# Altium PCB LED.PcbDoc
Units mm, origin at the board's own origin, x right, y up, seen from the top; angles counter-clockwise.
Board outline 20 x 20 mm, 2 copper layers (Top Layer, Bottom Layer), stack 1.671 mm thick; 5 components, 4 nets, 10 pads, 1 vias.
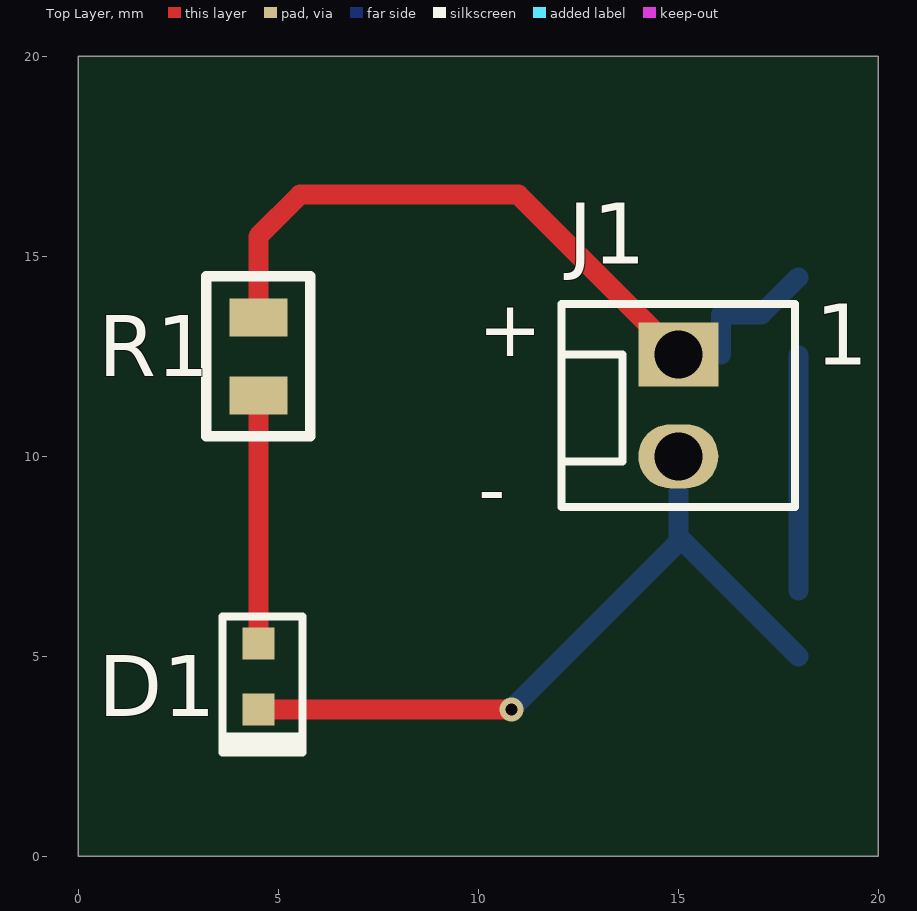
[diagram p0: Top Layer view]
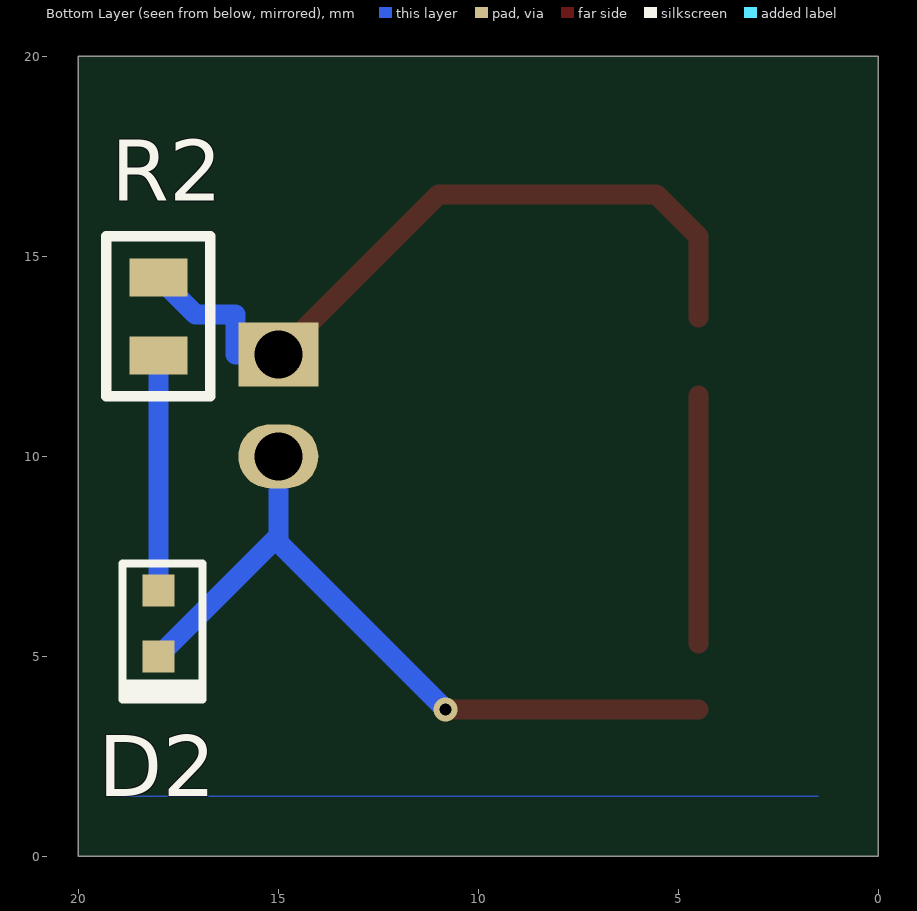
[diagram p1: Bottom Layer view, seen from below]
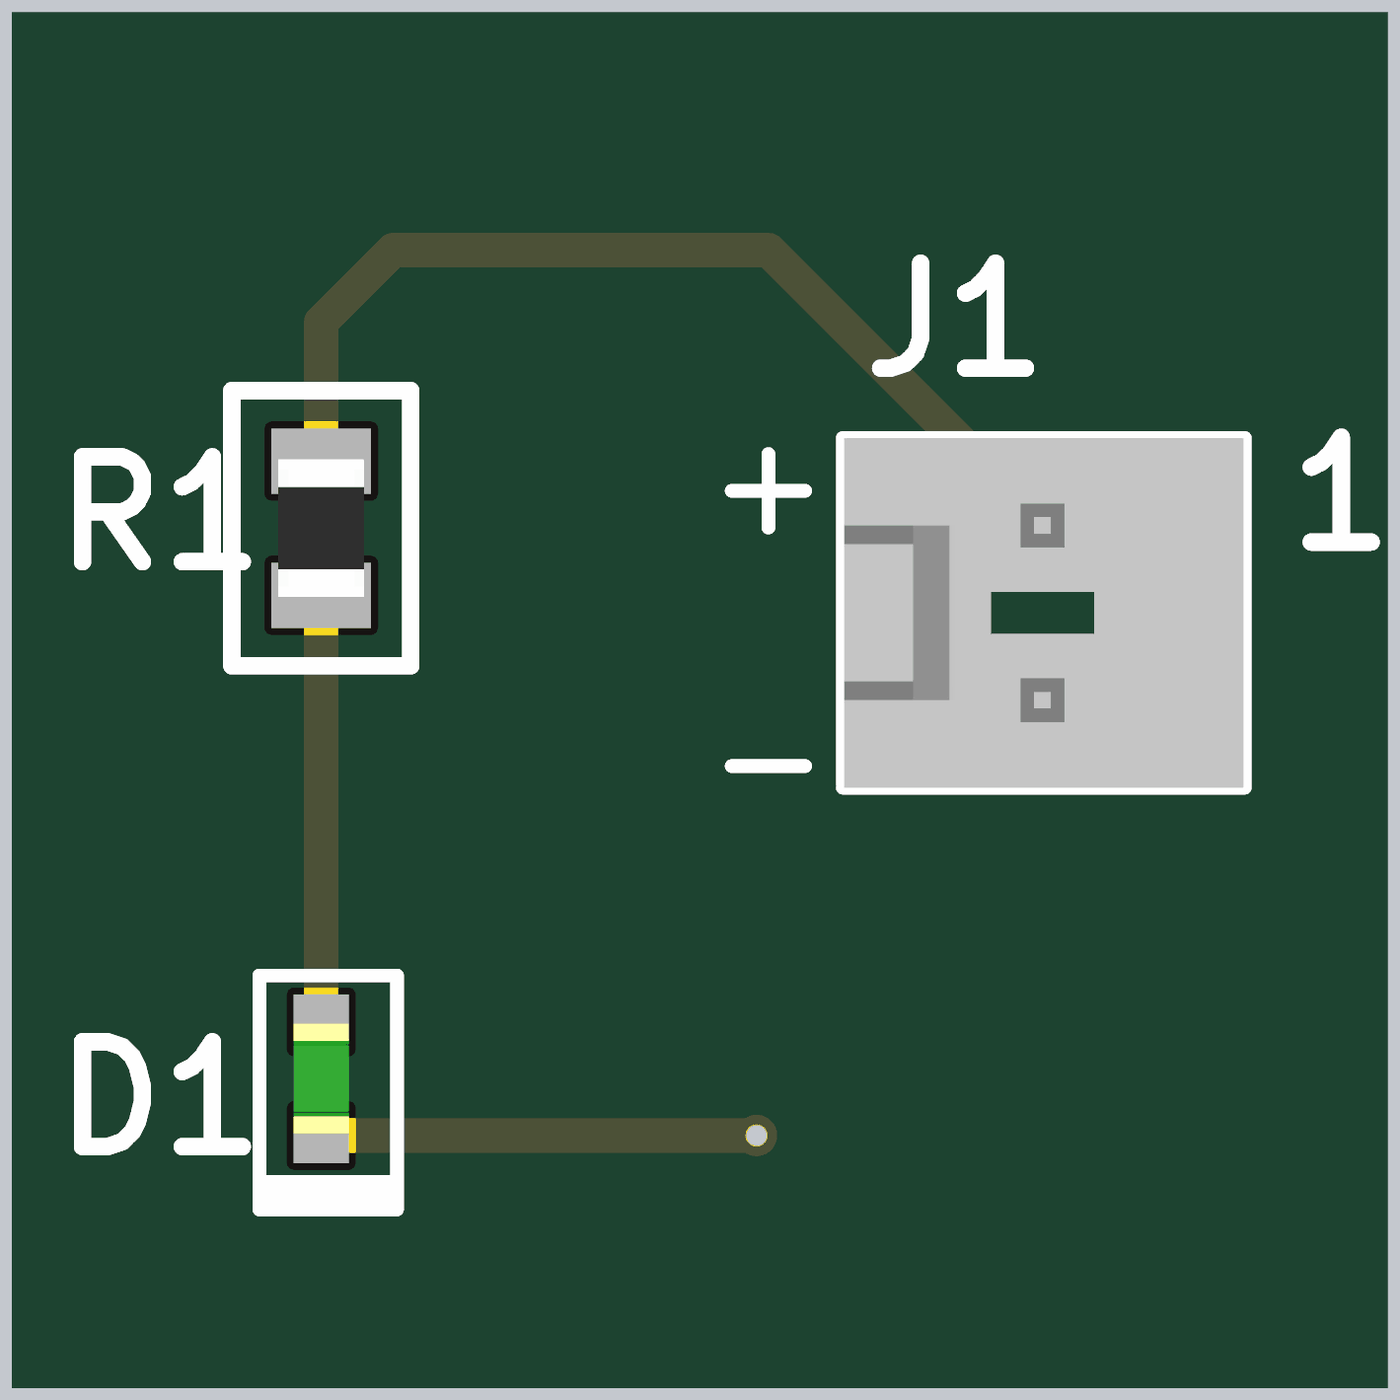
[diagram p2: 3D render of the assembled board from above, using the file's embedded part models]

## Layer stack, top to bottom
Top Solder: solder mask 0.0102, Solder Resist, Dk 3.5
Top Layer: signal copper 0.0356
Dielectric 1: dielectric 1.6, FR-4, Dk 4.8
Bottom Layer: signal copper 0.0356
Bottom Solder: solder mask 0.0102, Solder Resist, Dk 3.5

## Board outline
0,0 20,0 20,20 0,20

## Design rules (kind name [scope] priority, off if disabled: settings)
Clearance [All] p1: gap=0.3 ignorepadtopadclearanceinfootprint=FALSE
PolygonConnect [All] p1: connectstyle=Relief reliefconductorwidth=0.254 reliefentries=4 polygonreliefangle="90 Angle" airgapwidth=0.254
RoutingVias [All] p1: holewidth=0.3 width=0.6 viastyle="Through Hole" minholewidth=0.3 minwidth=0.6 maxholewidth=0.3 maxwidth=0.6
SilkToSolderMaskClearance [IsPad] p1: minsilkscreentomaskgap=0.1 clearancetoexposedcopper=TRUE
SolderMaskExpansion [All] p1: expansion=0.102
Width [All] p1: maxlimit=1 minlimit=0.3 preferedwidth=0.5
29 further rules are at their usual default settings.

## Components (designator, comment, footprint, x,y, rotation, side; value= is the part's Value field where it differs from the comment)
D1 "Green" LED0603G 4.5,4.5 r90 top
D2 "Green" LED0603G 18,5.825 r90 bottom
J1 "1x2 Header" HEADER1X2 15,12.54 r0 top
R1 "360R" R0805 4.5,12.5 r90 top
R2 "360R" R0805 18,13.5 r90 bottom

## Footprints (in the part's own frame and the unit in brackets; to place one, negate y for a bottom-side part, rotate by r counter-clockwise, add the part's x,y. Pads: shape width x height; smd on the part's side, far side on the other; paste and mask are expansions set on the pad)
HEADER1X2 [mm]
  rect 2x1.6 hole 1.2: 1(0,0)
  oval 2x1.6 hole 1.2: 2(0,-2.54)
  silkscreen extent -2.92,-3.81 2.92,1.27, body extent -2.9,-3.81 2.9,1.27, height 11.71
LED0603G [mm]
  rect 0.8x0.8 smd: 1(-0.825,0) 2(0.825,0)
  silkscreen extent -1.9,-1.1 1.5,0.9, body extent -0.8,-0.4 0.8,0.4, height 0.4
R0805 [mm]
  rect 0.95x1.45 smd: 1(-0.975,0) 2(0.975,0)
  silkscreen extent -2,-1.3 2,1.3, body extent -1,-0.62 1,0.63, height 0.61

## Part data
D1 D2: library part SML-LXFM0603SUGCTR, "Super Ultra Green 1.6 x 0.8 mm 120° Water Clear 50 mcd 2.2 V Surface Mount LED", Case/Package=0603, Forward Current=20mA, Forward Voltage=2.2V, Manufacturer=Lumex, Max Operating Temperature=85°C, Min Operating Temperature=-40°C, Package Quantity=2000, Power Rating=105mW, Supplier Part Number 1=67-2320-6-ND, Category=Optoelectronics, Color=Green, ComponentLink1Description=http://www.mouser.com/ds/2/244/SML-LXFM0603SUGCTR-115255.pdf?src-supplier=Mouser, ComponentLink1URL=http://www.mouser.com/ds/2/244/SML-LXFM0603SUGCTR-115255.pdf?src-supplier=Mouser, ComponentLink2Description=http://www.lumex.com/specs/SML-LXFM0603SUGCTR.pdf?src-supplier=Future+Electronics, ComponentLink2URL=http://www.lumex.com/specs/SML-LXFM0603SUGCTR.pdf?src-supplier=Future+Electronics, Illumination Color=Green, Lead Free="Lead Free", Lens Style=Clear, Luminous Intensity=50mcd, Manufacturer Part Number=SML-LXFM0603SUGCTR, Mount="Surface Mount", Packaging="Tape and Reel", Pricing 1="1=1.04, 10=0.676, 100=0.4431, 1000=0.3498 (USD)", RoHS Compliant=Yes, Stock 1=27636, Supplier 1=Digi-Key, Viewing Angle=120°
J1: library part 22-27-2021, "CONN HEADER 2POS .100 VERT TIN", Color=White, Contact Resistance=20mR, Current Rating=4A, Flammability Rating="UL94 V-0", Housing Color=Natural, Insulation Resistance=50GR, Manufacturer=Molex, Max Operating Temperature=75°C, Min Operating Temperature=0°C, Package Quantity=24000, Supplier Part Number 1=WM4111-ND, Voltage Rating=500V, Voltage Rating (AC)=250V, Approvals=UL,CSA, Categories=Connectors, ComponentLink1Description=https://www.verical.com/server-webapp/html/getDatasheet?partID=163454&src-supplier=Verical, ComponentLink1URL=https://www.verical.com/server-webapp/html/getDatasheet?partID=163454&src-supplier=Verical, ComponentLink2Description=http://www.molex.com/webdocs/datasheets/pdf/en-us/0022272021_PCB_HEADERS.pdf?src-supplier=Avnet, ComponentLink2URL=http://www.molex.com/webdocs/datasheets/pdf/en-us/0022272021_PCB_HEADERS.pdf?src-supplier=Avnet, ComponentLink3Description=http://uk.rs-online.com/webdocs/13c2/0900766b813c2e6e.pdf?src-supplier=RSComponents, ComponentLink3URL=http://uk.rs-online.com/webdocs/13c2/0900766b813c2e6e.pdf?src-supplier=RSComponents, ComponentLink4Description=http://www.farnell.com/datasheets/2305438.pdf?src-supplier=Mouser, ComponentLink4URL=http://www.farnell.com/datasheets/2305438.pdf?src-supplier=Mouser, ComponentLink5Description=http://www.farnell.com/datasheets/2305438.pdf?src-supplier=Jameco, ComponentLink5URL=http://www.farnell.com/datasheets/2305438.pdf?src-supplier=Jameco, Contact Gender=Male, Contact Material=Tin, Contact Plating=Tin, Contact Type=-, Depth=5.8mm, Gender=Male, Height=11.7mm, Housing Material=Nylon, Lead Free="Lead Free", Lead Pitch=2.54mm, Length=10.16mm, Manufacturer Part Number=22-27-2021, Material=Nylon, Max Current Rating=4A, Mount="Through Hole", Number of Circuits=2, Number of Contacts=2, Number of Positions=2, Number of Rows=1, Orientation=Straight, Packaging=Bulk, Pitch=2.54mm, Pricing 1="1=0.29, 10=0.232, 100=0.1702, 1000=0.1354, 5000=0.1161, 10000=0.1083 (USD)", Radiation Hardening=No, REACH SVHC=Unknown, RoHS Compliant=Yes, Series=6410, Stock 1=35556, Supplier 1=Digi-Key, Termination="Through Hole", Voltage Rating (DC)=250V, Weight=0.00769oz, Working Voltage=250V
R1 R2: library part CRCW0805360RFKEA, "Res Thick Film 0805 360 Ohm 1% 1/8W ±100ppm/°C Molded SMD SMD Paper T/R", Case/Package=0805, Case Code (Metric)=2012, Manufacturer=Vishay, Max Operating Temperature=155°C, Max Power Dissipation=125mW, Min Operating Temperature=-55°C, Package Quantity=5000, Resistor Type="Thick Film", Supplier Part Number 1=541-360CCT-ND, Temperature Coefficient=100ppm/°C, Tolerance=1%, Voltage Rating=150V, Case Code (Imperial)=0805, Category=Resistors, ComponentLink1Description=http://www.vishay.com/docs/20035/dcrcwe3.pdf?src-supplier=Digi-Key, ComponentLink1URL=http://www.vishay.com/docs/20035/dcrcwe3.pdf?src-supplier=Digi-Key, Contact Plating=Tin, Depth=1.25mm, Features="Automotive AEC-Q200", Height=0.45mm, Lead Free="Lead Free", Length=2mm, Manufacturer Part Number=CRCW0805360RFKEA, Military Standard=Not, Number of Pins=2, Number of Terminals/Pins=2, Number of Terminations=2, Packaging="Cut Tape", Power Rating=125mW, Pricing 1="1=0.1, 10=0.067, 100=0.0271, 1000=0.0122, 2500=0.0106 (USD)", Radiation Hardening=No, REACH SVHC=Unknown, Resistance=360R, RoHS Compliant=Yes, Series="D/CRCW E3", Stock 1=0, Supplier 1=Digi-Key, Technology="THICK FILM", Termination=SMD/SMT, Voltage Rating (DC)=150V, Weight=0.000194oz, Width=1.25mm

## Via types
v1: diameter 0.6, hole 0.3, Top Layer to Bottom Layer, tented both sides, 1 vias

## Nets (pads, with @x,y where several pads share a name; then routed paths per layer and width w, separated by ;. In a path a pad name is that pad's centre, name@x,y a point inside that pad or via, vN(x,y) a via of type N, cw(c..) or ccw(c..) an arc to the next point about the centre after c; other vN are vias at no path point)
+3V3: J1.1 R1.2 R2.2 | length 19
  Top Layer w0.5: R1.2 4.5,15.5 5.54,16.54 11,16.54 J1.1
  Bottom Layer w0.5: J1.1 16.065,12.54 16.065,13.55 17.075,13.55 R2.2
DIODE1: D1.2 R1.1 | length 6.2
  Top Layer w0.5: D1.2 R1.1
DIODE2: D2.2 R2.1 | length 5.9
  Bottom Layer w0.5: D2.2 R2.1
GND: D1.1 D2.1 J1.2 | length 18.6
  Top Layer w0.5: D1.1 v1(10.825,3.675)
  Bottom Layer w0.5: v1(10.825,3.675) 15,7.85 15,8 ; J1.2 15,8 ; D2.1 15,8

## Polygon pours and split planes (outlines as drawn)
GND on Bottom Layer "Bottom Layer-GND 1" (solid, pour order 20): 12.5,-1
GND on Bottom Layer "Bottom Layer-GND 3" (solid, pour order 14): 5.5,0.5
GND on Bottom Layer "Bottom Layer-GND 4" (solid, pour order 10): 23,10
GND on Bottom Layer "Bottom Layer-GND 5" (solid, pour order 6): 16,-1
GND on Bottom Layer "Bottom Layer-GND" (solid, pour order 0): 1.5,1.5 19,1.5
no net on Top Layer "Top Layer-No Net" (solid, pour order 26): 4.5,-1.5

## Silkscreen, mask and mechanical layers (free items; w line width, h text height)
Top Overlay:
  text "+" at 10,12.5 h1.4
  text "-" at 10,8.5 h1.4
Board Outline:
  the board outline again, w0.1

## Text inside footprints (layer, text, board x,y; h text height)
J1: Top Overlay "1" at 18.429,12.286 h1.52